# Allegro board PSU-A1-2.brd
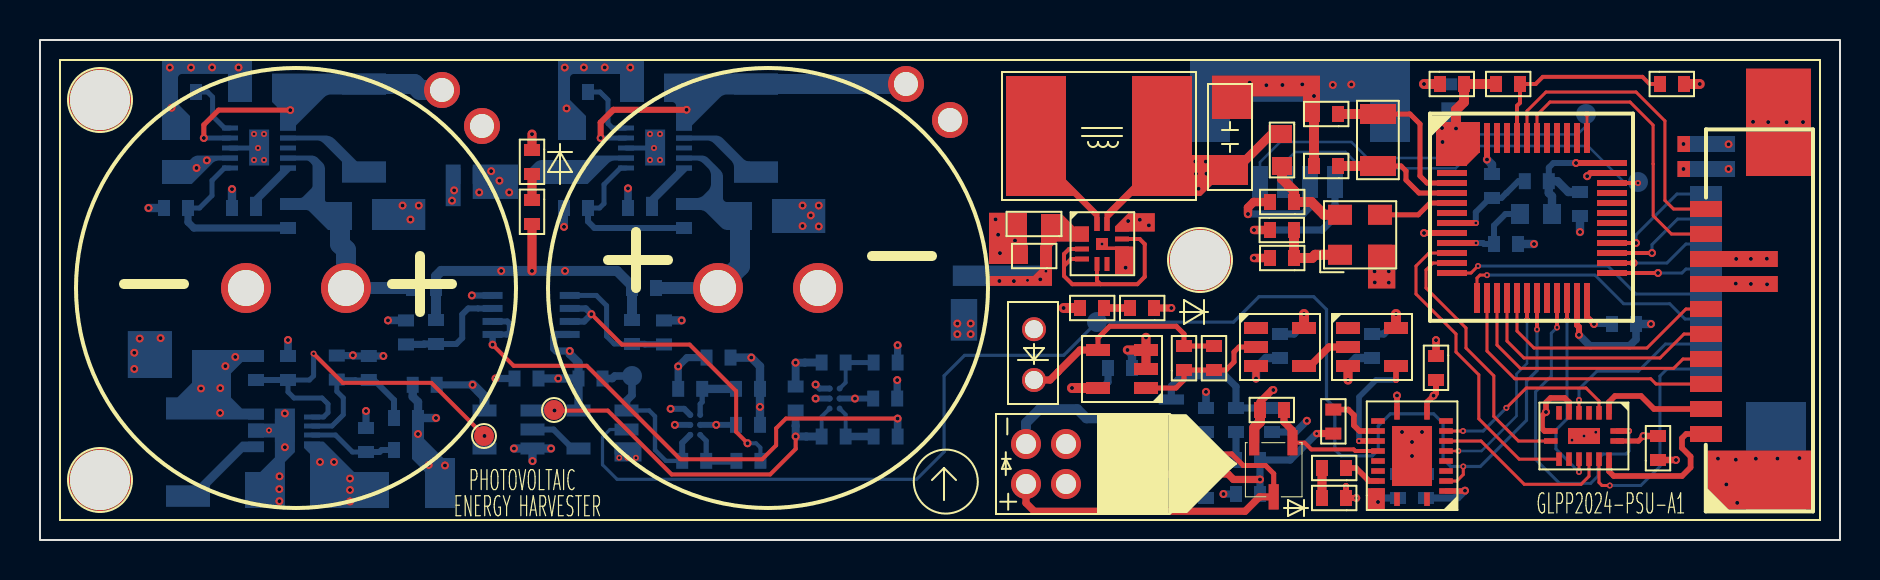
[diagram p0: board, top side]
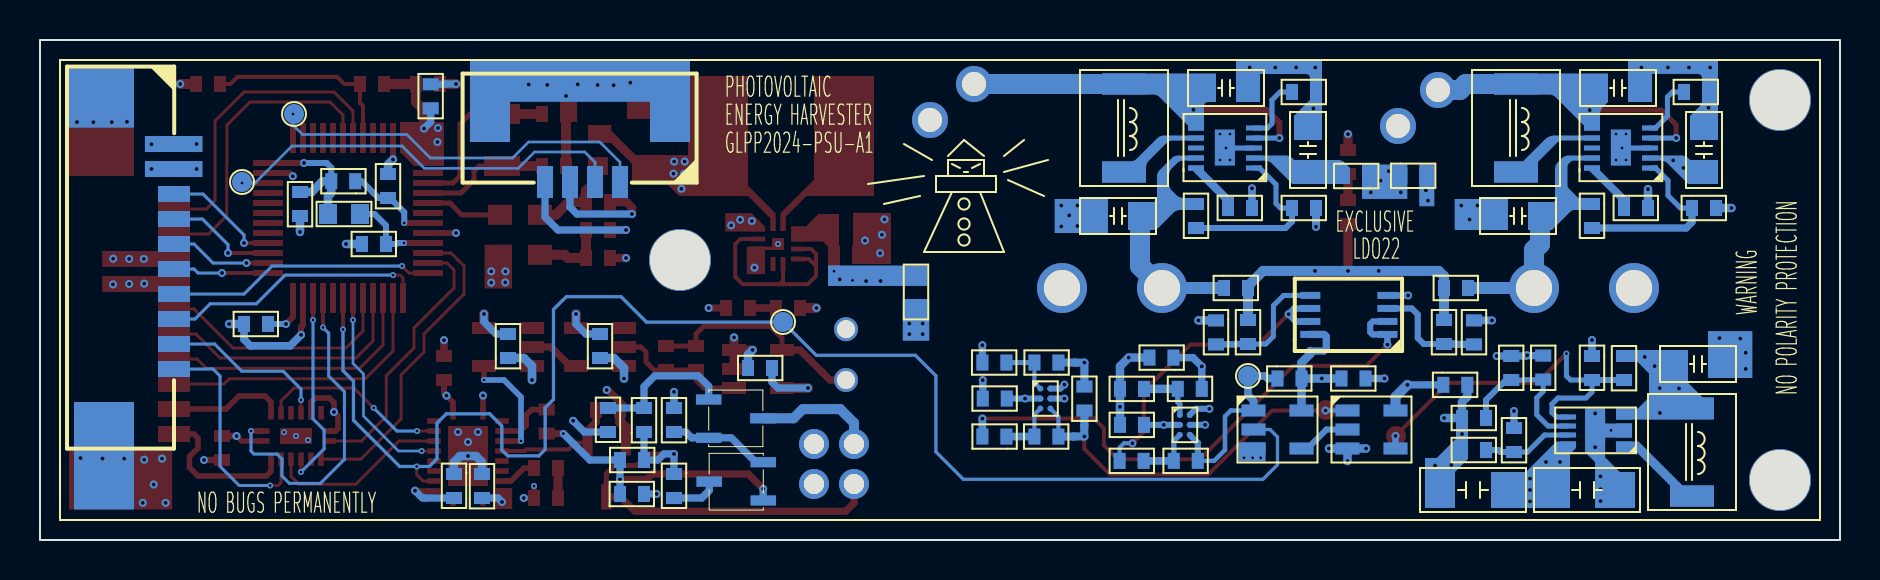
[diagram p1: board, bottom side, seen from below]

Outline 90 x 25 mm; copper layers: TOP, GND, VCC, BOTTOM. Coordinates in mm from the lower left corner of the outline.
Outline path: rectangle 0,0 90,25

## Design rules (mm)
constraint set DEFAULT: min track width 0.127
net group N478267: nets N478267 N478271
net group N485107: nets N485107 N485115
net group TX_PWR_EN: nets N478365 TX_PWR_EN
net group VCAP1: nets N478345 VCAP1
net group VCAP2: nets N485373 VCAP2
net group BOOST_EN: nets BOOST_EN N478287 N479043 N490401 N490405 VCAP
net group CHG_FULL: nets CHG_FULL N490413 N490465 N490853 N490915 N491089 N491653 UV_SHDN
net group FIBER_TX_3V3: nets FIBER_TX_3V3 N527048 N527198 N527202 N527222
net group P1V8: nets N517140 N518111 N602776

## Placement (name value [footprint] x y rotation side)
C1  0.1uF  [C0402]  70 22.8 0 top
C2  12pF  [C0402]  64.9 21.3 180 top
C3  33uF  [C1206]  59.5 21.8 270 top
C4  12pF  [C0402]  64.9 18.7 180 top
C5  0.1uF  [C0402]  62.7 16.9 180 top
C6  10uF  [C0603]  50.5 15.8 180 top
C7  0.1uF  [C0402]  50.3 14.2 180 top
C8  4.2V/1F  [SUC_THR_5D0_21D5]  12.8 12.6 180 top
C9  4.2V/1F  [SUC_THR_5D0_21D5]  36.4 12.6 0 top
C10  DNI  [C0402]  58.7 8.5 90 top
C11  0.1uF  [C0402]  69.8 9.2 270 top
C12  0.1uF  [C0402]  80.9 4 90 top
C13  0.1uF  [C0402]  70.47 22.78 270 bottom
C14  10uF  [C0805]  31.8 22.6 180 bottom
C15  10uF  [C0805]  12.2 22.6 180 bottom
C16  10uF  [C0805]  26.6 18.4 90 bottom
C17  10uF  [C0805]  6.8 18.4 90 bottom
C18  0.1uF  [C0402]  72.6 17.1 90 bottom
C19  0.1uF  [C0402]  77 16.2 90 bottom
C20  1uF  [C0402]  30.6 16.6 180 bottom
C21  1uF  [C0402]  10.8 16.6 180 bottom
C22  10uF  [C0805]  35 16.2 0 bottom
C23  10uF  [C0805]  15 16.2 0 bottom
C24  0.1uF  [C0402]  73.9 14.8 180 bottom
C25  0.1uF  [C0402]  79.8 10.8 180 bottom
C26  0.1uF  [C0402]  66.6 9.1 90 bottom
C27  0.1uF  [C0402]  62 9.1 90 bottom
C28  0.1uF  [C0402]  33.33 9.12 0 bottom
C29  2.2uF  [C0402]  42.88 8.87 180 bottom
C30  10uF  [C0805]  8.2 8.8 180 bottom
C31  33pF  [C0402]  16.44 9.2 270 bottom
C32  0.1uF  [C0402]  53.4 8.6 0 bottom
C33  0.1uF  [C0402]  24.93 8.07 180 bottom
C34  0.1uF  [C0402]  19.84 7.76 180 bottom
C35  2.2uF  [C0402]  36 7.56 180 bottom
C36  0.1uF  [C0402]  42.86 7.07 180 bottom
C37  0.1uF  [C0402]  36 5.76 180 bottom
C38  0.1uF  [C0402]  69.3 3.3 270 bottom
C39  0.1uF  [C0402]  67.9 2.1 90 bottom
C40  22uF  [C1206]  16.7 2.5 0 bottom
C41  22uF  [C1206]  14.3 2.5 180 bottom
D1  GREEN LED  [LED0402]  24.6 19.5 270 top
D2  GREEN LED  [LED0402]  55.7 11.6 180 top
D3  GREEN LED  [LED0402]  65.3 2.1 180 top
J1  SIP-1x10  [SMD-1D25-10P-DEG0]  83.3 5.3 90 top
J2  SIP-1x4  [SMD-1D25-4P-DEG0]  61 17.9 0 bottom
J3  SIP-1x10  [SMD-1D25-10P-DEG0]  83.3 19.8 270 bottom
L1  33uH/1A  [IND_SMD_7D0X6D6]  56.1 20.2 180 top
L2  2.2uH  [L0603]  62.1 20.3 270 top
L3  10uH/1A  [IND_SMD_4D4X4D2]  35.8 22.8 270 bottom
L4  10uH/1A  [IND_SMD_4D4X4D2]  16.2 22.8 270 bottom
L5  2.2uH  [L0603]  75.6 16.3 180 bottom
L6  2.2uH/500mA  [L0603]  46.2 11.6 90 bottom
L7  4.7uH/1A  [IND_SMD_4D4X4D2]  7.4 6.6 270 bottom
LD1  LaserDiode  [AXIAL_2D0_4P]  49.3 2.8 90 top
NOREF  -  []  0 25 0 top
NOREF#2  -  [unnamed#2]  3 3 0 top
NOREF#3  -  []  3 3 90 top
NOREF#4  -  []  0 0 90 top
NOREF#5  -  [unnamed#2]  58 14 0 top
NOREF#6  -  [unnamed#2]  3 22 0 top
PD1  Photodiode  [PD-THR-2P]  49.7 8 90 top
Q1  Si2301BDS-HXY  [SOT23-3]  63.1 5.3 180 top
Q2  2SC1815  [SOT23-3]  57 7.5 270 bottom
Q3  2SC1815  [SOT23-3]  53.4 1.5 90 bottom
R1  DNI  [R0402]  24.6 17 270 top
R2  DNP  [R0402]  61.5 15.5 0 top
R3  0R  [R0402]  62.7 14.1 180 top
R4  2K  [R0402]  53.2 11.6 180 top
R5  DNI  [R0402]  57.2 8.5 90 top
R6  10K  [R0402]  61 6.5 0 top
R7  510  [R0402]  64.67 6.52 270 top
R8  2K  [R0402]  65.3 3.6 180 top
R9  200K  [R0402]  27.4 22.4 180 bottom
R10  200K  [R0402]  7.8 22.4 180 bottom
R11  10K  [R0402]  74.24 17.94 0 bottom
R12  1M  [R0402]  27.4 16.6 180 bottom
R13  1M  [R0402]  7.4 16.6 180 bottom
R14  2.26M  [R0402]  32.2 16.8 270 bottom
R15  2.26M  [R0402]  12.4 16.8 270 bottom
R16  0R  [R0402]  30.8 12.6 180 bottom
R17  0R  [R0402]  19.8 12.6 180 bottom
R18  1M  [R0402]  31.2 10.98 270 bottom
R19  1M  [R0402]  29.6 9.8 90 bottom
R20  1M  [R0402]  19.8 9.8 90 bottom
R21  1M  [R0402]  18.3 10.98 270 bottom
R22  3.3K  [R0402]  39.08 8.87 0 bottom
R23  1M  [R0402]  14.84 8.02 90 bottom
R24  100K  [R0402]  12.4 9.2 270 bottom
R25  DNI  [R0402]  10.8 8 90 bottom
R26  22.9K?  [R0402]  28.12 8.07 180 bottom
R27  3.3K  [R0402]  31.91 7.56 0 bottom
R28  378K?  [R0402]  37.78 6.47 90 bottom
R29  562K  [R0402]  18.9 6.1 180 bottom
R30  510  [R0402]  61.6 6.6 270 bottom
R31  510  [R0402]  59.8 5.4 90 bottom
R32  40.2  [R0402]  58.3 5.4 90 bottom
R33  200K  [R0402]  41.68 5.17 0 bottom
R34  998K?  [R0402]  40.28 5.17 180 bottom
R35  DNI  [R0402]  16.3 4.4 90 bottom
R36  100K  [R0402]  18.9 4.5 180 bottom
R37  510  [R0402]  59.8 4 0 bottom
R38  3.01K  [R0402]  34.82 3.96 0 bottom
R39  4.99K  [R0402]  33.31 3.96 180 bottom
R40  40.2  [R0402]  58.3 3.3 270 bottom
R41  510  [R0402]  61 2.3 180 bottom
R42  DNP  [R0402]  21.93 18.21 180 bottom
R43  0R  [R0402]  23.6 18.2 0 bottom
R44  0R  [R0402]  81 22.8 0 top
R45  DNI  [R0402]  74 22.8 180 top
TP1  Solar Cell V+  [TP_THR_1D8_1D2]  43.3 22.8 180 bottom
TP2  Solar Cell V+  [TP_THR_1D8_1D2]  20.1 22.5 180 bottom
TP3  Solar Cell V-  [TP_THR_1D8_1D2]  45.5 21 180 bottom
TP4  Solar Cell V-  [TP_THR_1D8_1D2]  22.1 20.7 180 bottom
TP5  T POINT S  [TP_SMD_1D0_NP]  77.3 21.3 180 bottom
TP6  T POINT S  [TP_SMD_1D0_NP]  79.9 17.9 180 bottom
TP7  T POINT S  [TP_SMD_1D0_NP]  52.85 10.9 180 bottom
TP8  T POINT S  [TP_SMD_1D0_NP]  29.6 8.2 180 bottom
TP9  T POINT S  [TP_SMD_1D0_NP]  22.2 5.2 0 top
TP10  T POINT S  [TP_SMD_1D0_NP]  25.7 6.5 0 top
U1  STM32L051C8T6  [LQFP-48]  74.6 16.1 270 top
U2  LTC3336EV#TRPBF  [LQFN-12-2D0X2D0MM]  53.1 14.8 0 top
U3  SN74AHC1G14DBVR  [SOT-23-5]  60.8 10.6 0 top
U4  SN74AHC1G14DBVR  [SOT-23-5]  65.4 10.6 0 top
U5  TLV365DBVR  [SOT-23-5]  55.3 7.6 180 top
U6  TMUX1309BQBR  [WQFN-16-3D5X2D5MM]  77.2 5.2 180 top
U7  TXS0108ERGYR  [VQFN-20]  68.6 4.2 90 top
U8  LTC3105EDD#PBF  [DFN-10]  32.2 18.6 90 bottom
U9  LTC3105EDD#PBF  [DFN-10]  12.4 18.6 90 bottom
U10  ADA4051-2ARMZ  [MSOP-8]  26.24 10.28 90 bottom
U11  ADCMP380-1ACBZ-RL7  [WLCSP-6]  39.98 7.57 180 bottom
U12  ADCMP380-1ACBZ-RL7  [WLCSP-6]  33.01 6.26 180 bottom
U13  SN74LVC1G32DBVR  [SOT-23-5]  29.32 6.48 180 bottom
U14  SN74AUP1G08DBVR  [SOT-23-5]  24.62 6.48 180 bottom
U15  LTC3539EDCB#PBF  [DFN-8]  13.6 4.8 90 bottom
Y1  32.768KHz  [SMD3215-2P]  66.9 21.3 270 top
Y2  32.0MHz_X1G0041710040  [SMD2520-4P]  66 15.3 0 top

## Library data of the parts
C1-C7 C10-C13 C19 C25-C27 C32-C34 C38 C39 = CAP NP
C8 C9 C14-C18 C22-C24 C30 = CAP NP: signal model: DEFAULT_CAPACITOR_1e+07pF_2_1
C20 C21 = CAP NP: signal model: DEFAULT_CAPACITOR_1e+06pF_2_1
C28 C36 C37 = CAP NP: signal model: DEFAULT_CAPACITOR_100000pF_2_1
C29 C35 = CAP NP: signal model: DEFAULT_CAPACITOR_2.2e+06pF_2_1
C31 = CAP NP: signal model: DEFAULT_CAPACITOR_33.000000pF_2_1
C40 C41 = CAP NP: signal model: DEFAULT_CAPACITOR_2.2e+07pF_2_1
D1-D3 = LED
J1 J3 = SIP-1x10
J2 = SIP-1x4
L1 L2 L6 = INDUCTOR
L3 L4 = INDUCTOR: signal model: DEFAULT_INDUCTOR_10000nH_2_1
L5 L7 = INDUCTOR: signal model: DEFAULT_INDUCTOR_4700nH_2_1
LD1 = LaserDiode
PD1 = Photodiode
Q1 = FH3415A
Q2 Q3 = 2SC1815
R1-R5 R8 R16 R17 R42 R43 = R
R6 R24-R26 R28 R35 R36 = R: signal model: DEFAULT_RESISTOR_10000OHM_2_1
R7 R30 R31 R37 R41 = R: signal model: DEFAULT_RESISTOR_510.000000OHM_2_1
R9 R10 = R: signal model: DEFAULT_RESISTOR_200000OHM_2_1
R11-R13 R18-R21 R23 R44 R45 = R: signal model: DEFAULT_RESISTOR_0.001OHM_2_1
R14 R15 = R: signal model: DEFAULT_RESISTOR_0.00226OHM_2_1
R22 R27 = R: signal model: DEFAULT_RESISTOR_3300OHM_2_1
R29 = R: signal model: DEFAULT_RESISTOR_562000OHM_2_1
R32 R40 = R: signal model: DEFAULT_RESISTOR_40.000000OHM_2_1
R33 R38 = R: signal model: DEFAULT_RESISTOR_36000OHM_2_1
R34 R39 = R: signal model: DEFAULT_RESISTOR_147000OHM_2_1
TP1-TP4 = T POINT A
TP5-TP10 = T POINT S
U1 = STM32L051C8T6
U2 = LTC3336
U3 U4 = SN74AHC1G14DBVR
U5 = TLV365DBVR
U6 = TMUX1309
U7 = TXS0108ERGYR
U8 U9 = LTC3105EDD#PBF
U10 = ADA4051-2ARMZ
U11 U12 = ADCMP380-1ACBZ-RL7
U13 = SN74LVC1G32DBVR
U14 = SN74AUP1G08
U15 = LTC3539EDCB#PBF
Y1 = CRYSTAL
Y2 = OSCILLATOR

## Footprints (pads in the part's own frame, mm; a bottom-side part is the same pattern mirrored in y, then rotated)
AXIAL_2D0_4P
  round 1.5 hole 1: 1(0,0) 2(2,0) 3(0,-2) 4(2,-2)
C0402
  rect 0.6x0.8 smd: 1(0,0) 2(1.2,0)
C0603
  rect 0.9x1 smd: 1(0,0) 2(1.6,0)
C0805
  rect 1.2x1.4 smd: 1(0,0) 2(2.2,0)
C1206
  rect 1.5x1.8 smd: 1(0,0) 2(3.3,0)
DFN-8
  rect 0.25x0.8 smd: 1(0,-2.8) 2(0.45,-2.8) 3(0.9,-2.8) 4(1.35,-2.8) 5(1.35,0) 6(0.9,0) 7(0.45,0) 8(0,0)
  rect 1.2x1 smd: 9(0.676,-1.355)
DFN-10
  rect 0.25x0.8 smd: 1(0,-2.9) 2(0.5,-2.9) 3(1,-2.9) 4(1.5,-2.9) 5(2,-2.9) 6(2,0) 7(1.5,0) 8(1,0) 9(0.5,0) 10(0,0)
  rect 1.8x1 smd: 11(1.022,-1.444)
IND_SMD_4D4X4D2
  rect 1.05x2.2 smd: 1(0,0) 2(4.4,0)
IND_SMD_7D0X6D6
  rect 3x6 smd: 1(0,0) 2(6.3,0)
L0603
  rect 0.9x1 smd: 1(0,0) 2(1.6,0)
LED0402
  rect 0.6x0.8 smd: 1(0,0) 2(1.2,0)
LQFN-12-2D0X2D0MM
  rect 0.7x0.25 smd: 1(-1,0.75) 2(-1,0.25) 3(-1,-0.25) 4(-1,-0.75) 7(1,-0.75) 8(1,-0.25) 9(1,0.25) 10(1,0.75)
  rect 0.25x0.7 smd: 5(-0.25,-1) 6(0.25,-1) 11(0.25,1) 12(-0.25,1)
  rect 0.6x0.6 smd: 13(0,0)
LQFP-48
  rect 0.3x1.5 smd: 1(-2.75,-4) 2(-2.25,-4) 3(-1.75,-4) 4(-1.25,-4) 5(-0.75,-4) 6(-0.25,-4) 7(0.25,-4) 8(0.75,-4) 9(1.25,-4) 10(1.75,-4) 11(2.25,-4) 12(2.75,-4) 25(2.75,4) 26(2.25,4) 27(1.75,4) 28(1.25,4) 29(0.75,4) 30(0.25,4) 31(-0.25,4) 32(-0.75,4) 33(-1.25,4) 34(-1.75,4) 35(-2.25,4) 36(-2.75,4)
  rect 1.5x0.3 smd: 13(4,-2.75) 14(4,-2.25) 15(4,-1.75) 16(4,-1.25) 17(4,-0.75) 18(4,-0.25) 19(4,0.25) 20(4,0.75) 21(4,1.25) 22(4,1.75) 23(4,2.25) 24(4,2.75) 37(-4,2.75) 38(-4,2.25) 39(-4,1.75) 40(-4,1.25) 41(-4,0.75) 42(-4,0.25) 43(-4,-0.25) 44(-4,-0.75) 45(-4,-1.25) 46(-4,-1.75) 47(-4,-2.25) 48(-4,-2.75)
MSOP-8
  rect 0.35x1 smd: 1(-0.001,-3.615) 2(0.649,-3.615) 3(1.299,-3.615) 4(1.949,-3.615) 5(1.949,0.241) 6(1.299,0.241) 7(0.649,0.241) 8(-0.001,0.241)
PD-THR-2P
  round 1.2 hole 0.9: 1(0,0) 2(2.54,0)
R0402
  rect 0.6x0.8 smd: 1(0,0) 2(1.2,0)
SMD2520-4P
  rect 1.2x1 smd: 1(-1,-1.04) 2(1,-1.04) 3(1,0.96) 4(-1,0.96)
SMD3215-2P
  rect 1x1.8 smd: 1(0,0) 2(2.6,0)
SMD-1D25-4P-DEG0
  rect 0.8x1.6 smd: 1(0,0) 2(1.25,0) 3(2.5,0) 4(3.75,0)
  rect 2x3 smd: 5(6.5,-3.5) 6(-2.5,-3.5)
SMD-1D25-10P-DEG0
  rect 0.8x1.6 smd: 1(0,0) 2(1.25,0) 3(2.5,0) 4(3.75,0) 5(5,0) 6(6.25,0) 7(7.5,0) 8(8.75,0) 9(10,0) 10(11.25,0)
  rect 2x3 smd: 11(-2.6,-3.5) 12(13.9,-3.5)
SOT23-3
  rect 0.51x1.27 smd: 1(0.476,0.434) 2(2.391,0.434) 3(1.415,3.142)
SOT-23-5
  rect 1.2x0.6 smd: 1(0,0) 2(0,-0.95) 3(0,-1.9) 4(2.4,-1.9) 5(2.4,0)
SUC_THR_5D0_21D5
  round 2.5 hole 1.8: 1(-2.5,0) 2(2.5,0)
TP_SMD_1D0_NP
  round 1 smd: 1(0,0)
TP_THR_1D8_1D2
  round 1.8 hole 1.2: 1(0,0)
unnamed#2
  round 3.1 hole 3 unplated: (0,0)
VQFN-20
  rect 0.68x0.28 smd: 1(-2.157,-0.75) 10(2.158,-0.75) 11(2.158,0.75) 20(-2.157,0.75)
  rect 0.28x0.68 smd: 2(-1.75,-1.7) 3(-1.25,-1.7) 4(-0.75,-1.7) 5(-0.25,-1.7) 6(0.25,-1.7) 7(0.75,-1.7) 8(1.25,-1.7) 9(1.75,-1.7) 12(1.75,1.7) 13(1.25,1.7) 14(0.75,1.7) 15(0.25,1.7) 16(-0.25,1.7) 17(-0.75,1.7) 18(-1.25,1.7) 19(-1.75,1.7)
  rect 3x2 smd: EPAD(0,0)
WLCSP-6
  round 0.3 smd: A1(0,0) A2(0.5,0) B1(0,-0.5) B2(0.5,-0.5) C1(0,-1) C2(0.5,-1)
WQFN-16-3D5X2D5MM
  rect 0.68x0.28 smd: 1(-1.658,-0.25) 8(1.657,-0.25) 9(1.657,0.25) 16(-1.658,0.25)
  rect 0.28x0.68 smd: 2(-1.25,-1.158) 3(-0.75,-1.158) 4(-0.25,-1.158) 5(0.25,-1.158) 6(0.75,-1.158) 7(1.25,-1.158) 10(1.25,1.157) 11(0.75,1.157) 12(0.25,1.157) 13(-0.25,1.157) 14(-0.75,1.157) 15(-1.25,1.157)
  rect 1.6x0.8 smd: EPAD(0,0)

## Nets
GND: C1.1 C2.2 C3.1 C4.2 C5.2 C6.2 C7.2 C8.2 C9.2 C11.1 C12.1 C13.1 C14.2 C15.2 C16.2 C17.2 C18.2 C19.1 C20.2 C21.2 C22.2 C23.2 C24.1 C25.1 C26.1 C27.1 C28.2 C29.1 C30.2 C32.2 C33.2 C34.2 C35.1 C36.1 C37.1 C38.1 C39.2 C40.2 C41.2 D1.1(CATHODE) D2.1(CATHODE) D3.1(CATHODE) J1.8 J1.11 J1.12 J2.3 J2.5 J2.6 J3.2 J3.11 J3.12 PD1.2 R3.2 R9.2 R10.2 R12.2 R13.2 R18.1 R21.1 R24.1 R29.1 R30.2 R32.2 R36.1 R41.2 R44.2 TP3.1(TP) TP4.1(TP) U1.8(VSSA) U1.23 U1.35 U1.47 U2.7 U2.8 U2.10 U2.13 U3.3 U4.3 U5.2 U5.3 U6.6 U6.8 U6.EPAD U7.11 U7.EPAD U8.3 U8.11 U9.3 U9.11 U10.4(V-) U11.A2 U11.B2 U12.A2 U12.B2 U13.3 U14.3 U15.2 U15.3 U15.9 Y2.2
P1V8: C1.2 C3.2 C11.2 C12.2 C13.2 C19.2 C25.2 C38.2 J2.4 L1.1 L2.1 L5.1 R2.1 R11.2 R45.2 U1.1 U1.24 U1.36 U1.48 U2.11(VOUT) U6.16(VDD) U7.2 U7.10
P3V3: C26.2 C27.2 C31.1 C32.1 C39.1 C40.1 C41.1 J1.7 J3.1 L6.1 Q1.2(S) R4.2 R6.1 R23.2 U3.5 U4.5 U5.5 U7.19(VCCB) U15.8(VOUT)
BOOST_EN: R24.2 R25.1 TP9.1(TP) U14.4(Y) U15.5
CHG_FULL: R26.1 R39.2 TP8.1(TP) U12.C2 U13.1
FIBER_RX: U6.13 U7.7
FIBER_RX_3V3: U4.4(Y) U7.14
FIBER_TX: U6.3 U7.8
FIBER_TX_3V3: R7.1 U7.13
I2C1_SCL: J1.9 U1.42
I2C1_SDA: J1.10 U1.43
IAM_ALIVE: TP7.1(TP) U1.19 U7.3 U13.2
IR_UART_RX: J3.10 U6.14
IR_UART_TX: J3.9 U6.5
LDO22: C28.1 C33.1 C34.1 C36.2 C37.2 R22.1 R26.2 R27.1 R28.2 R42.1 R43.1 U10.8 U11.B1 U12.B1 U13.5 U14.5
LDO22-1: C17.1 R42.2 U9.2
LDO22-2: C16.1 R43.2 U8.2
LPUART1_RX: U1.22 U6.12
LPUART1_TX: U1.21 U6.1
OV_UART_RX: J1.1 U6.15
OV_UART_TX: J1.2 U6.2
ROUTE_A0: U1.10 U6.10
ROUTE_A1: U1.11 U6.9
SPI1_MISO: J1.5 U1.16
SPI1_MOSI: J1.6 U1.17
SPI1_NSS: J1.3 U1.14
SPI1_SCK: J1.4 U1.15
SPI2_MISO: J3.4 U1.27
SPI2_MOSI: J3.3 U1.28
SPI2_NSS: J3.6 U1.25
SPI2_SCK: J3.5 U1.26
SYS_SWCLK: J2.1 TP5.1(TP) U1.37
SYS_SWDIO: J2.2 TP6.1(TP) U1.34
TX_EN: U1.18 U7.6
TX_PWR_EN: Q1.1 R6.2 U7.15
USART1_RX: U1.31
USART1_TX: U1.30
USART2_RX: J3.8 U1.13
USART2_TX: J3.7 U1.12
UV_SHDN: R28.1 R34.2 TP10.1(TP) U11.C2 U14.1
VCAP: C30.1 L7.1 R1.2 R16.2 R17.1 R19.2 R20.2 R25.2 R35.2 U15.4
VCAP1: C8.1 C23.1 R15.1 R17.2 U9.9(VOUT)
VCAP2: C9.1 C22.1 R14.1 R16.1 U8.9(VOUT)
N478267: C15.1 L4.1 TP2.1(TP) U9.4 U9.6
N478271: L4.2 U9.7
N478287: L7.2 U15.1
N478345: R13.1 R15.2 U9.1
N478365: C31.2 R23.1 R29.2 U15.6
N478369: R10.1 U9.5
N478385: C21.1 U9.10
N479043: R35.1 R36.2 U15.7
N485107: C14.1 L3.1 TP1.1(TP) U8.4 U8.6
N485115: L3.2 U8.7
N485373: R12.1 R14.2 U8.1
N485445: R9.1 U8.5
N485483: C20.1 U8.10
N490401: R18.2 R19.1 U10.5
N490405: R20.1 R21.2 U10.3
N490413: C29.2 R22.2 U11.A1(VCC)
N490465: R33.2 U10.1 U10.2
N490853: R33.1 R34.1 U11.C1
N490915: R38.2 U10.6 U10.7
N490953: U13.4(Y) U14.2
N491089: C35.2 R27.2 U12.A1(VCC)
N491611: C6.1 C7.1 L6.2 U2.1 U2.2
N491653: R38.1 R39.1 U12.C1
N492211: L1.2 U2.12
N492453: U2.3 U2.4 U2.5 U2.9
N504730: C2.1 U1.3 Y1.1
N504882: C4.1 U1.4 Y1.2
N512213: U1.5 Y2.3
N512221: R2.2 R3.1 Y2.1
N512229: C5.1 L2.2 Y2.4(VDD)
N517140: C24.2 L5.2 U1.9
N518111: C18.1 R11.1 U1.7
N527048: LD1.1 Q1.3 R31.1 R37.1 R40.1
N527184: LD1.2 Q2.3
N527198: Q3.1 R7.2 R37.2 R41.1
N527202: Q3.3 R40.2
N527222: Q2.1 R30.1 R31.2
N527434: Q2.2(E) Q3.2(E) R32.1
N541574: D3.2 R8.2
N546758: C10.2 PD1.1 R5.2 U5.4
N546765: C10.1 R5.1 U3.2 U5.1(VOUT)
N549679: U3.4(Y) U4.2
N554827: D2.2 R4.1
N555295: D1.2 R1.1
N563900: R8.1 U7.18
N602776: R44.1 R45.1 U1.44

Pads without a net: LD1 3 4; U1 2 6 20 29 32 33 38 39 40 41 45 46; U2 6; U3 1; U4 1; U6 4 7 11; U7 1 4 5 9 12 16 17 20; U8 8; U9 8

## Via types
v1: diameter 0.4, hole 0.2, TOP to BOTTOM, 197 vias
v2: diameter 0.3, hole 0.15, TOP to BOTTOM, 43 vias

## Routing (per net, layer and track width the routed paths; a pad name or vN(x,y) marks a point on that pad's centre or on a via; arc(x,y) is an arc through that point)
GND: length 76
  TOP w0.28: U7.11 v1(67.85,7.22) ; U6.8 75.23,5.45 75.1,5.58 75.1,6.2 v1(75.3,6.4) 75.3,6.87 75.53,7.1 76.24,7.1 76.45,6.89 U6.6
  TOP w0.3: U1.23 76.85,10.75 76.95,10.65 76.95,10.26 v1(76.95,10.26) ; v1(77.36,18.19) 77.52,18.35 U1.35 ; U1.47 v1(72.35,19.02) ; v1(65.81,2.1) D3.1 v2(65.3,2.7) ; U1.8 v1(69.2,15.35)
  TOP w0.32: C12.1 v1(81.8,4)
  TOP w0.36: D2.1 v1(56.57,11.6) ; U3.3 v1(60.8,8.07)
  TOP w0.38: C11.1 v1(69.8,9.99)
  TOP w0.42: v1(60.4,16.3) 60.4,16.62 60.68,16.9 C5.2 ; R3.2 v1(60.7,14.1)
  TOP w0.46: v1(55.3,10.13) U5.3 ; U5.3 v1(54.37,9.5) ; U5.3 U5.2 ; U4.3 v1(65.4,8) ; D1.1 v1(24.6,20.29)
  TOP w0.5: C4.2 C2.2 v1(63.7,22.2) ; R44.2 v1(82.99,22.8) ; C1.1 v1(69.2,22.8)
  BOTTOM w0.25: U9.3 v2(10.9,19.6) ; U8.3 v2(30.7,19.6)
  BOTTOM w0.3: U12.A2 32.21,6.56 v1(31.53,6.56) ; v1(38.78,7.77) 38.98,7.57 U11.A2 ; U11.B2 v1(38.78,7.07) ; U12.B2 v1(31.75,5.76)
  BOTTOM w0.32: U10.4 v1(21.59,12.23)
  BOTTOM w0.36: v1(69.2,22.8) 69.74,22.8 69.76,22.78 C13.1 ; v1(63.34,5.96) 62.78,5.4 R30.2 ; J2.3 63.5,16.65 63.15,16.3 v1(60.4,16.3) ; R41.2 v1(59.17,2.3) ; C29.1 v1(42.88,9.74) ; C33.2 v1(22.78,8.07) ; C36.1 v1(42.86,8)
  BOTTOM w0.38: C25.1 79.8,10.03 79.48,9.71 77.49,9.71 v1(76.95,10.26) ; R21.1 v1(17.4,10.98) ; R24.1 v1(12.4,10) ; C20.2 v1(29.4,17.58) ; R32.2 v1(58.3,7.41)
  BOTTOM w0.4: R12.2 v1(26.2,15.66)
  BOTTOM w0.42: v1(23.7,4.57) U14.3 ; U14.3 v1(24.62,3.95) ; U14.3 v1(25.55,4.57) ; C27.1 61.3,9.1 60.8,8.6 v1(60.8,8.07) ; v1(65.4,8) U4.3 65.8,9.1 C26.1 ; C24.1 v1(74.7,14.8) ; v1(72.35,19.02) 72.6,18.77 C18.2 ; R18.1 v1(32.08,10.98) ; C37.1 v1(36,6.66) C35.1 36,8.68 v1(35.56,9.12) C28.2 ; C19.1 v1(77,15.4) ; v1(54.37,9.5) 54.6,9.27 C32.2 ; C39.2 67.9,3.89 68.21,4.2 v1(68.6,4.2) 68.99,4.2 69.3,3.89 C38.1 ; C34.2 18.64,7.17 18.9,6.9 R29.1 v1(19.8,6.1) ; v1(9.6,17.54) C21.2 ; R13.2 v1(5.43,16.6) ; C25.1 v1(80.55,10.8)
  vias: v1(4.71,9.36) v1(4.71,8.55) v1(4.99,10.07) v1(6.03,10.1) v1(6.49,23.62) v1(6.58,21.61) v1(7.55,23.62) v1(8.6,23.63) v1(9.93,23.63) v1(11.98,3.18) v1(11.97,2.54) v1(11.97,1.94) v1(12.24,6.33) v1(12.24,4.64) v1(18.13,16.72) v1(18.52,16.02) v1(18.94,16.72) v1(18.9,5.3) v1(19.43,3.75) v1(20.25,3.73) v1(26.24,23.62) v1(26.33,21.58) v1(27.2,23.63) v1(28.24,23.63) v1(29.51,23.62) v1(38.13,16.72) v1(38.13,15.7) v1(38.54,16.23) v1(38.94,16.72) v1(38.94,15.68) v1(47.78,16.03) v1(47.91,15.26) v1(48,14.34) v1(48.75,14.97) v1(54.28,13.62) v1(54.41,15.95) v1(54.99,16.01) v1(55.44,15.73) v1(60.49,22.87) v1(61.32,22.74) v1(62.12,22.75) v1(63.11,22.78) v1(64.64,22.75) v1(65.56,22.78) v1(66.73,13.43) v1(66.74,12.88) v1(67.44,13.43) v1(67.44,12.87) v1(68.1,5.4) v1(68.6,4.9) v1(69.1,5.4) v1(82.17,18.55) v1(83.72,1.86) v1(83.9,4.07) v1(84.31,2.78) v1(84.43,18.55) v1(84.81,14.05) v1(84.79,4.02) v1(84.86,1.86) v1(85.54,14.05) v1(85.65,20.91) v1(85.79,4.07) v1(86.34,14.06) v1(86.41,20.89) v1(86.87,4.07) v1(87.33,20.89) v1(87.97,4.1) v1(88.15,20.89) v2(10.7,20.3) v2(10.7,19) v2(11.2,20.3) v2(11.2,19) v2(11.45,5.48) v2(28.96,4.11) v2(29.37,4.11) v2(29.8,4.11) v2(30.5,20.3) v2(30.5,19) v2(31,20.3) v2(31,19) v2(53.1,14.8) v2(76.6,4.99) v2(77.2,5.2) v2(77.79,5.39)
P1V8: length 91.3
  TOP w0.26: v1(80.17,5.2) 79.92,4.95 U6.16
  TOP w0.28: U7.2 71.23,2.45 v1(71.25,2.47) ; v1(69.68,7.22) 69.35,6.89 U7.10
  TOP w0.3: v1(77.7,10.8) 77.35,11.15 U1.24 ; C11.2 69.8,7.34 v1(69.68,7.22) ; v1(76.8,18.85) U1.36
  TOP w0.32: C12.2 v1(80.17,5.2)
  TOP w0.42: R2.1 v1(60.7,15.5)
  TOP w0.5: R45.2 C1.2 71.2,21.9 70.8,21.5 v1(70.8,20.57)
  VCC w0.127: v1(77.7,10.8) 77.7,12.49 ; 77.7,12.49 78.8,11.39 78.8,10.22 ; 77.7,12.49 77.7,16.35 76.14,17.91 75.23,17.91 75.06,18.07 ; 71.41,7.9 70.73,7.22 v1(69.68,7.22) ; 71.41,7.9 72.33,8.82 77.64,8.82 78.8,9.97 78.8,10.22 ; 71.41,7.9 71.95,7.36 71.95,3.16 v1(71.25,2.47) ; v1(60.7,15.5) 61.15,15.5 61.89,16.24 61.89,17.13 60.81,18.21 58.77,18.21 58.4,17.84 58.2,17.84 v1(57.93,17.56) ; v1(70.1,20.6) 63.09,20.6 60.95,18.46 58.75,18.46 v1(58.29,18.92) ; 75.06,18.07 75.83,18.85 v1(76.8,18.85) ; 75.06,18.07 71.99,18.07 70.8,19.27 v1(70.8,20.57) ; 78.8,10.22 80.17,8.85 v1(80.17,5.2)
  VCC w0.3: 76.5,18.2 76.5,18.55 v1(76.8,18.85)
  BOTTOM w0.3: C25.2 77.74,10.8 v1(77.7,10.8) ; R11.2 75.44,18.62 75.67,18.85 v1(76.8,18.85)
  BOTTOM w0.36: C38.2 70.75,2.1 70.76,2.11 70.89,2.11 v1(71.25,2.47) ; C13.2 70.47,20.91 v1(70.8,20.57) ; J2.4 64.75,16.15 64.1,15.5 v1(60.7,15.5)
  BOTTOM w0.42: L5.1 75.6,17.19 75.44,17.35 R11.2 75.87,17.94 76.41,17.4 C19.2
  vias: v1(57.77,18.92) v1(57.8,18.31) v1(58.32,18.32) v1(70.13,19.9)
P3V3: length 16.4
  TOP w0.36: v1(61.67,7.5) 61.6,7.5 61,6.9 R6.1
  TOP w0.5: U3.5 v1(63.2,11.3) ; R4.2 v1(51.18,11.6) ; R6.1 61,5.9 60.71,5.61 Q1.2 ; U4.5 v1(67.8,11.3) ; v1(51.6,7.6) U5.5
  BOTTOM w0.36: v1(66.9,1.9) 67.1,2.1 C39.1 ; v1(63.2,11.3) 63.2,10.79 62.71,10.3 C27.2 ; v1(51.6,7.6) 53.11,7.6 53.4,7.89 C32.1 ; R23.2 15.63,9.22 v1(15.64,9.23) 15.68,9.2 C31.1 v1(17.17,9.2) ; C26.2 67.19,10.3 67.8,10.91 v1(67.8,11.3)
  vias: v1(14,3.9) v1(14.7,3.9) v1(15.5,3.07) v1(15.5,2.5) v1(15.5,1.93) v1(45.87,10.82) v1(45.87,10.29) v1(46.53,10.82) v1(46.53,10.29) v1(82.17,19.8) v1(84.43,19.79) v1(84.79,12.82) v1(85.54,12.8) v1(86.35,12.78)
BOOST_EN: length 19.1
  TOP w0.2: v1(22.23,5.2) 19.57,7.86 15.14,7.86 v2(13.68,9.32)
  BOTTOM w0.25: v2(13.68,9.32) 13.68,8.21 13.47,8 R24.2 12.4,7.4 12.7,7.1 14.1,7.1 14.4,6.8 14.4,6.37 14.18,6.15 U15.5
  BOTTOM w0.3: R25.1 R24.2 ; U14.4 v1(22.23,5.2)
CHG_FULL: length 9.6
  BOTTOM w0.22: R39.2 31.29,3.96 30.75,4.5 30.75,6.18 30.46,6.48 U13.1
  BOTTOM w0.3: U12.C2 32.11,4.86 R39.2
  BOTTOM w0.38: U13.1 29.32,6.97 29.6,7.24 TP8.1 28.74,8.2 28.62,8.07 R26.1
FIBER_RX: length 9.1
  TOP w0.15: U6.13 77.45,3.18 77.05,2.79 74.22,2.79 72.05,4.95 U7.7
FIBER_RX_3V3: length 6.1
  TOP w0.28: U7.14 v2(65.95,4.95) ; v2(67.8,8) U4.4
  BOTTOM w0.28: v2(67.8,8) 66.8,8 65.95,7.15 v2(65.95,4.95)
FIBER_TX: length 9.4
  TOP w0.15: U6.3 77.95,6.95 77.3,7.6 74.31,7.6 v2(73.32,6.61) ; U7.8 v2(71.15,5.45)
  BOTTOM w0.15: v2(73.32,6.61) 72.16,5.45 v2(71.15,5.45)
FIBER_TX_3V3: length 3
  TOP w0.28: U7.13 65.97,5.45 65.69,5.73 65.69,6.24 65.42,6.52 R7.1
I2C1_SCL: length 15.3
  TOP w0.15: U1.42 74.85,21.25 75.5,21.9 79.5,21.9 80.65,20.75 80.65,18.8 80.66,18.8 80.66,16.21 81.57,15.3 J1.9
I2C1_SDA: length 15.4
  TOP w0.15: J1.10 81.67,16.55 81.25,16.98 81.25,20.95 79.8,22.4 75.3,22.4 74.35,21.45 U1.43
IAM_ALIVE: length 74.8
  TOP w0.15: U7.3 70.84,2.95 71.16,3.27 v2(71.16,3.68)
  TOP w0.2: U1.19 v2(74.85,10.53)
  BOTTOM w0.127: 52.84,10.89 TP7.1
  BOTTOM w0.16: 29.32,5.52 28.5,5.52 28.12,5.15 28.12,3.76 28.86,3.03 43.83,3.03 45.21,4.41 45.21,8.21 46.23,9.23 51.18,9.23 52.18,10.23 52.18,10.23 TP7.1 ; v2(74.85,10.53) 74.85,8.47 74.33,7.94 74.33,5.99 72.02,3.68 v2(71.16,3.68) 70.54,3.68 70.15,4.06 70.15,5.84 69.68,6.31 67.52,6.31 66.91,5.7 66.91,4.5 66.61,4.21 65.06,4.21 64.74,4.52 64.74,6.61 64.33,7.03 64.33,11.52 63.68,12.17 60.95,12.17 59.67,10.89 52.84,10.89
IR_UART_RX: length 11.6
  TOP w0.15: U6.14 77.95,2.87 78.1,2.72 v2(78.49,2.72)
  BOTTOM w0.15: v2(78.49,2.72) 80.04,2.72 81,3.68 81,8.2 81.35,8.55 J3.10
IR_UART_TX: length 8.5
  TOP w0.15: U6.5 v2(76.95,7)
  BOTTOM w0.15: v2(76.95,7) 76.95,7.55 77.84,8.44 79.91,8.44 81.27,9.8 J3.9
LDO22: length 19.5
  BOTTOM w0.3: C36.2 v1(40.75,7.07) U11.B1 ; U12.B1 v1(33.81,5.76) C37.2
  BOTTOM w0.36: v1(26.48,9.45) 25.81,9.45 25.68,9.58 25.68,10.17 25.79,10.28 U10.8 ; v1(21.63,7.76) C34.1 ; R27.1 v1(31.91,8.68) 32.35,9.12 C28.1
  BOTTOM w0.4: R22.1 38.24,8.87 38.24,8.87 v1(37.78,8.87) R28.2
  BOTTOM w0.42: v1(26.48,9.45) 26.48,9.3 26.93,8.86 R26.2 ; R26.2 U13.5 ; R26.2 v1(25.91,8.07) C33.1
  BOTTOM w0.5: v1(21.63,7.76) 22.23,7.16 U14.5
  vias: v1(21.96,17.38) v1(22.56,18.44) v1(22.97,17.97) v1(23.46,17.38)
LDO22-1:
  vias: v1(7.83,18.6) v1(8.34,18.98) v1(20.6,16.97) v1(20.71,17.48)
LPUART1_RX: length 10.1
  TOP w0.15: U6.12 v2(76.95,3.4)
  TOP w0.2: U1.22 v2(76.35,11)
  BOTTOM w0.15: v2(76.95,3.4) 75.8,4.55 75.8,5.5 76.35,6.06 v2(76.35,11)
LPUART1_TX: length 16.4
  TOP w0.2: v2(75.85,10.63) U1.21
  TOP w0.28: U6.1 v2(79.45,5.45)
  BOTTOM w0.15: v2(79.45,5.45) 79.45,4.45 79.3,4.3 78.15,4.3 77.9,4.05 77.9,3.2 77.53,2.83 75.98,2.83 74.78,4.03 74.78,7.41 75.56,8.2 75.56,10.34 v2(75.85,10.63)
OV_UART_RX: length 7.9
  TOP w0.28: J1.1 82.31,5.3 82.1,5.09 82.1,4.6 82.53,4.17 82.53,3.63 82.1,3.2 78.69,3.2 78.45,3.44 U6.15
OV_UART_TX: length 5.8
  TOP w0.28: U6.2 78.45,6.9 78.75,7.2 80.05,7.2 80.7,6.55 J1.2
ROUTE_A0: length 15.9
  TOP w0.15: U6.10 73.96,4.04 71.94,6.06 71.94,8.26 70.8,9.4 70.8,10.3 68.8,12.3 68.8,13.7 69.45,14.35 U1.10
ROUTE_A1: length 13.5
  TOP w0.15: U1.11 69.65,13.85 69.3,13.5 69.3,12.6 71.3,10.6 71.3,9.6 72.69,8.21 72.69,6.18 73.92,4.95 U6.9
SPI1_MISO: length 12.9
  TOP w0.15: U1.16 73.35,9.95 74.2,9.1 81,9.1 82.2,10.3 J1.5
SPI1_MOSI: length 12.3
  TOP w0.15: J1.6 82.3,11.55 80.35,9.6 74.7,9.6 73.85,10.45 U1.17
SPI1_NSS: length 14.3
  TOP w0.15: J1.3 80.8,7.8 80.54,8.06 73.74,8.06 72.35,9.45 U1.14
SPI1_SCK: length 13.5
  TOP w0.15: J1.4 82.15,9.05 81.68,8.58 74.02,8.58 72.85,9.75 U1.15
SPI2_MISO: length 5.7
  TOP w0.2: v1(80.6,14.35) U1.27
  BOTTOM w0.15: v1(80.6,14.35) 80.6,14.77 81.88,16.05 J3.4
SPI2_MOSI: length 6
  TOP w0.2: U1.28 v1(79.8,14.85)
  BOTTOM w0.15: J3.3 81.85,17.3 79.8,15.25 v1(79.8,14.85)
SPI2_NSS: length 4.8
  TOP w0.2: U1.25 v1(80.9,13.35)
  BOTTOM w0.15: v1(80.9,13.35) 82.1,13.35 82.3,13.55 J3.6
SPI2_SCK: length 5.1
  TOP w0.2: U1.26 v1(79.68,13.85)
  BOTTOM w0.15: J3.5 82.3,14.8 81.35,13.85 v1(79.68,13.85)
SYS_SWCLK: length 20.5
  TOP w0.127: v2(77.35,21.3) U1.37
  BOTTOM w0.127: v2(77.35,21.3) 77.35,20.75 76.88,20.28 71.66,20.28 70.48,19.1 66.37,19.1 65.57,19.9 62.01,19.9 61,18.89 J2.1
SYS_SWDIO: length 21.7
  TOP w0.2: v2(79.9,17.85) U1.34
  BOTTOM w0.127: v2(79.9,17.85) 79.25,17.85 77.4,19.7 71.9,19.7 70.78,18.58 66.09,18.58 65.27,19.4 62.76,19.4 62.25,18.89 J2.2
TX_EN: length 10.4
  TOP w0.127: v2(70.92,4.45) U7.6
  TOP w0.2: U1.18 v2(74.35,11)
  BOTTOM w0.127: v2(74.35,11) 74.35,8.83 73.83,8.3 73.83,6.2 72.08,4.45 v2(70.92,4.45)
TX_PWR_EN: length 6.3
  TOP w0.2: Q1.1 63.23,4.87 63.57,4.53 65.69,4.53 65.77,4.45 U7.15
  TOP w0.36: R6.2 62.2,5.9 62.62,5.48 Q1.1
USART2_RX: length 13.4
  TOP w0.15: v2(72.35,13.24) 72,13.24 71.85,13.1 U1.13
  BOTTOM w0.15: J3.8 82.25,11.05 81.49,11.81 79.18,11.81 77.75,13.24 v2(72.35,13.24)
USART2_TX: length 13.4
  TOP w0.15: v2(71.9,13.7) 71.55,13.35 U1.12
  BOTTOM w0.15: J3.7 79.79,12.3 78.39,13.7 v2(71.9,13.7)
UV_SHDN: length 19.8
  TOP w0.2: v1(37.78,5.18) 37.78,4.55 36.51,3.28 31.58,3.28 28.39,6.47 26.12,6.47 26.12,6.48 v1(25.73,6.48)
  BOTTOM w0.2: v1(25.73,6.48) U14.1 ; U11.C2 39.08,6.17 R34.2
  BOTTOM w0.4: R34.2 38.32,5.17 38.31,5.18 v1(37.78,5.18) 37.78,5.7 37.78,5.71 R28.1
VCAP: length 17.3
  TOP w0.46: R1.2 v1(24.6,13.45)
  BOTTOM w0.36: v1(16.3,6.45) R35.2
  BOTTOM w0.5: R19.2 R16.2 29.6,12.7 28.85,13.45 v1(26.25,13.45) v1(24.6,13.45) v1(23.06,13.45) 20.06,13.45 19.8,13.19 R17.1 R20.2
  vias: v1(8.05,7.58) v1(9.01,7.59) v1(9.01,6.35) v1(9.27,8.69) v1(9.77,9.15)
VCAP1: length 7
  BOTTOM w0.6: R17.2 C8.1
  BOTTOM w1: C8.1 15.3,14.5 15,14.8 C23.1
VCAP2: length 7.2
  BOTTOM w0.6: C9.1 R16.1
  BOTTOM w1: C22.1 35,13.7 C9.1
N478267: length 10.6
  TOP w0.25: v1(8.19,20.1) 8.19,20.76 8.93,21.5 v1(12.51,21.5)
  BOTTOM w0.25: U9.4 v1(8.19,20.1)
  BOTTOM w1: TP2.1 19.01,22.5 18.71,22.8 L4.1
N478345: length 9.2
  BOTTOM w0.25: R13.1 7.98,16.6 8.6,17.22 8.6,17.98 9.22,18.6 U9.1
  BOTTOM w0.36: R13.1 7.4,15.89 7.69,15.6 R15.2
N478365: length 7.9
  BOTTOM w0.127: 14.84,8.02 R23.1
  BOTTOM w0.25: U15.6 14.6,5.7 15.16,6.26 15.16,7.11 14.84,7.43 14.84,8.02 15.77,8.02 15.79,8 C31.2
  BOTTOM w0.3: R29.2 17.7,7 16.7,8 C31.2
N478369: length 3
  BOTTOM w0.25: U9.5 9.22,20.6 8.63,21.2 8.63,22.15 8.38,22.4 R10.1
N479043: length 4.5
  BOTTOM w0.25: U15.7 14.77,5.25 15.62,4.4 R35.1
  BOTTOM w0.3: R36.2 17.08,4.5 16.98,4.4 R35.1
N485107: length 14.1
  TOP w0.3: v1(32.33,21.51) 28.67,21.51 28.03,20.87 v1(28.03,20.1)
  BOTTOM w0.25: U8.4 v1(28.03,20.1)
  BOTTOM w1: L3.1 TP1.1
N485373: length 8.9
  BOTTOM w0.25: U8.1 29.02,18.6 28.2,17.77 28.2,16.82 27.98,16.6 R12.1
  BOTTOM w0.3: R12.1 27.4,15.92 27.72,15.6 R14.2
N485445: length 3.3
  BOTTOM w0.25: R9.1 28,22.4 28.4,22 28.4,20.82 28.62,20.6 U8.5
N490401: length 6.6
  BOTTOM w0.25: U10.5 27.82,12.23 28.33,11.72 28.33,10.18 28.71,9.8 R19.1
  BOTTOM w0.32: R19.1 30.23,9.8 30.25,9.78 R18.2
N490405: length 5.8
  BOTTOM w0.3: R20.1 20.81,9.8 21.11,10.1 21.11,11.28 21.41,11.58 21.9,11.58 21.9,11.58 U10.3
  BOTTOM w0.36: R21.2 19.19,9.78 19.21,9.8 R20.1
N490413: length 2.8
  BOTTOM w0.2: 40.28,8.87 40.28,7.87 U11.A1
  BOTTOM w0.25: 40.28,8.87 C29.2
N490465: length 27.6
  TOP w0.2: v1(22.63,9.77) 23.68,8.71 27.34,8.71 32.01,4.04 36.11,4.04 36.81,4.74 36.81,5.58 37.29,6.07 v1(42.88,6.07)
  BOTTOM w0.3: U10.1 23.32,10.28 23.33,10.28 23.38,10.28 23.49,10.39 23.49,10.8 23.36,10.93 U10.2
  BOTTOM w0.32: U10.1 v1(22.63,9.77)
  BOTTOM w0.38: R33.2 v1(42.88,6.07)
N490853: length 2.9
  BOTTOM w0.2: U11.C1 40.28,6.27 R34.1
  BOTTOM w0.38: R34.1 R33.1
N490915: length 15.5
  TOP w0.2: v1(35.38,4.84) 34.81,5.41 34.81,7.45 32.48,9.77 29.09,9.77 v1(27.57,11.29)
  BOTTOM w0.2: v1(35.38,4.84) 35.8,4.84 36.02,4.62 R38.2
  BOTTOM w0.32: U10.6 27.28,11.58 v1(27.57,11.29) 27.2,10.93 U10.7
N490953: length 2.7
  BOTTOM w0.3: U13.4 26.62,4.57 25.68,5.52 24.62,5.52
N491089: length 3
  BOTTOM w0.26: R27.2 33.11,6.9 33.01,6.8 U12.A1
  BOTTOM w0.42: R27.2 C35.2
N491611:
  vias: v1(47.97,12.95) v1(48.69,12.95) v1(50.01,13.03) v2(49.38,12.98) v2(50.3,13.44)
N491653: length 2.9
  BOTTOM w0.26: R39.1 33.31,4.96 U12.C1
  BOTTOM w0.38: R39.1 R38.1
N492453: length 11.5
  TOP w0.2: 53.02,12.79 54.87,12.79 55.24,13.16 55.24,14.79 54.98,15.05 U2.9 ; 53.02,12.79 52.85,12.96 U2.5 ; 53.02,12.79 51.61,12.79 51.2,13.2 51.2,13.7 ; U2.4 51.55,14.05 51.2,13.7 ; 51.2,13.7 51.2,14.3 51.45,14.55 U2.3
N504730: length 8.7
  TOP w0.25: U1.3 69.35,17.85 69,18.2 69,20.8 68.5,21.3 Y1.1
  TOP w0.5: C2.1 Y1.1
N504882: length 6.5
  TOP w0.25: U1.4 68.95,17.35 68.3,18 68.3,18.45 68.05,18.7 Y1.2
  TOP w0.5: C4.1 Y1.2
N512213: length 3.8
  TOP w0.25: Y2.3 68.91,16.26 69.5,16.85 U1.5
N512221: length 3.8
  TOP w0.5: R2.2 R3.1 63.6,14.1 63.76,14.26 Y2.1
N512229: length 4.6
  TOP w0.5: L2.2 62.1,18.06 62.7,17.46 C5.1 63.57,16.9 64.21,16.26 Y2.4
N517140: length 4.6
  TOP w0.3: U1.9 v2(71.8,14.85)
  BOTTOM w0.3: L5.2 73.27,16.3 72.7,15.73 C24.2 72.2,14.8 72.15,14.85 v2(71.8,14.85)
N518111: length 4.8
  TOP w0.3: v2(71.79,15.85) U1.7
  BOTTOM w0.3: v2(71.79,15.85) 71.79,16.39 72.5,17.1 C18.1 73.07,17.1 73.32,17.35 73.33,17.35 73.92,17.94 R11.1
N527048: length 22.8
  TOP w0.25: v1(58.3,4.3) 59.58,4.3 60.16,3.73 61.28,3.73 61.69,3.32 Q1.3
  TOP w0.36: Q1.3 60.98,2.16 60.26,1.44 49.71,1.44 49.3,1.85 LD1.1
  BOTTOM w0.36: R40.1 v1(58.3,4.3) 58.81,4.3 59.11,4 R37.1 R31.1
N527184: length 6.1
  BOTTOM w0.5: LD1.2 49.3,5.86 49.99,6.54 51.86,6.54 52.32,6.09 Q2.3
N527198: length 14.1
  TOP w0.36: v1(61,3.03) 59.67,3.03 59.4,3.3 54.58,3.3 v1(53.84,2.56) ; v2(63.83,5.32) R7.2
  BOTTOM w0.36: Q3.1 53.84,1.98 v1(53.84,2.56) ; v2(63.83,5.32) 62.51,4 R37.2 v1(61,3.03) R41.1
N527202: length 2.4
  BOTTOM w0.36: Q3.3 56.54,2.47 56.91,2.1 R40.2
N527222: length 7.2
  BOTTOM w0.36: R30.1 R31.2 59.8,7.67 59.26,8.21 57.09,8.21 56.57,7.69 Q2.1
N527434: length 5.1
  BOTTOM w0.36: R32.1 57.71,5.4 57.42,5.11 Q2.2 55.43,5.11 54.21,3.89 Q3.2
N541574: length 1.5
  TOP w0.46: R8.2 D3.2
N546758: length 11.2
  TOP w0.25: U5.4 52.9,10.1 53.49,10.69 56.81,10.69 57.2,10.3 R5.2 C10.2
  TOP w0.36: U5.4 52,9.5 50.9,8.4 50.9,8.4 50.5,8 PD1.1
N546765: length 6.9
  TOP w0.25: U5.1 56.8,7.6 57.2,8 R5.1 C10.1 59.3,8.5 59.7,8.9 59.7,9.4 59.95,9.65 U3.2
N549679: length 2.6
  TOP w0.36: U4.2 64.45,9.65 63.5,8.7 U3.4
N554827: length 1.3
  TOP w0.38: D2.2 R4.1
N555295: length 1.3
  TOP w0.46: R1.1 D1.2
N563900: length 1.9
  TOP w0.28: R8.1 65.8,3.6 66.45,2.95 U7.18
N602776: length 10.1
  TOP w0.2: R44.1 80.48,22.8 80.12,23.16 75.14,23.16 74.78,22.8 R45.1 74,21.86 73.85,21.71 U1.44

## Copper pours and planes (outline as drawn; the poured copper is in the pictures)
GND on TOP (solid shape): 67.77,12.58 66.4,12.58 66.4,14.76 67.77,14.76
GND on TOP (solid shape): 86.89,13.65 82.5,13.65 82.5,14.45 86.89,14.45
GND on TOP (solid shape): 88.55,18.2 85.3,18.2 85.3,23.57 88.55,23.57
GND on TOP (solid shape): 88.55,1.53 83.39,1.53 83.39,4.47 88.55,4.47
GND on TOP (solid shape): 55.74,15.43 53.75,15.43 53.75,15.68 54.41,16.34 55.74,16.34
GND on TOP (solid shape): 49.35,14.76 49.4,14.71 49.4,13.8 47.45,13.8 47.45,16.36 49.35,16.36
GND on TOP (solid shape): 53.4,14.68 54.66,14.68 54.66,13.29 53.75,13.29 53.75,14.5 52.8,14.5 52.8,15.1 53.4,15.1
GND on TOP (solid shape): 64,23.22 64,20.9 63.15,20.9 63.15,22.19 60.65,22.19 60.65,21.05 58.6,21.05 58.6,23.22 60.3,23.22 63.42,23.22
GND on BOTTOM (solid shape): 6.6,8.1 4.39,8.1 4.39,10.45 6.6,10.45
GND on BOTTOM (solid shape): 30.07,3.93 28.73,3.93 28.73,4.88 30.07,4.88
GND on BOTTOM (solid shape): 84.75,18.15 81.88,18.15 81.88,18.95 84.75,18.95
GND on BOTTOM (solid shape): 88.3,1.53 85.3,1.53 85.3,6.9 88.3,6.9
GND on BOTTOM (solid shape): 88.55,20.63 85.3,20.63 85.3,23.57 88.55,23.57
GND on BOTTOM (solid shape): 19.27,15.5 16.6,15.5 16.6,17.05 19.27,17.05
GND on BOTTOM (solid shape): 39.27,15.35 36.6,15.35 36.6,17.05 39.27,17.05
GND on BOTTOM (solid shape): 19.2,5.06 20.16,4.1 20.75,4.1 20.75,1.6 19.25,1.6 19.25,3.4 18.6,4.05 18.6,6.5 19.2,6.5
GND on BOTTOM (solid shape): 68.5,19.9 66.5,19.9 66.5,21.91 59.5,21.91 59.5,19.9 57.5,19.9 57.5,23.95 68.5,23.95
GND on BOTTOM (solid shape): 12.74,4.39 12.25,3.9 12.25,1.6 10.25,1.6 10.25,3.4 11.01,3.4 11.74,4.13 11.74,5.12 10.4,5.12 10.4,5.82 11.74,5.82 11.74,6.57 12.74,6.57
GND on BOTTOM (solid shape): 30.2,21.9 29,21.9 29,23.3 26.7,23.3 26.56,23.24 26.5,23.1 26.5,22 27.3,21.2 27.3,20 25.9,20 25.9,23.95 30.2,23.95
GND on BOTTOM (solid shape): 10.6,21.9 9.4,21.9 9.4,23.3 7.1,23.3 6.96,23.24 6.9,23.1 6.9,22 6.94,21.82 7.04,21.66 7.5,21.2 7.5,20 6.1,20 6.1,23.95 10.6,23.95
GND on GND: 1,24 89,24 89,1 1,1 ; 3 cut-outs
P1V8 on TOP (solid shape): 72,19.4 71.3,18.7 69.8,18.7 69.8,20.9 72,20.9
P1V8 on TOP (solid shape): 57.6,19.25 60.22,19.25 61.44,20.47 61.44,20.75 62.6,20.75 62.6,19.85 61.44,19.85 60.4,18.81 60.4,17.75 58.6,17.75 58.05,17.2 54.6,17.2 53.48,16.07 53.48,15.45 53.23,15.45 53.23,16.34 54.6,17.72 54.6,23.2 57.6,23.2
P1V8 on VCC: 80.68,23.95 80.68,3.61 80.29,3.21 72.78,3.21 71.7,2.13 69.77,2.13 68.74,3.16 68.74,7.07 69.15,7.48 69.15,11.93 68.5,12.58 60.97,12.58 60.17,13.37 60.17,15.71 58.98,16.89 54.6,16.89 54.59,16.9 54.59,23.95
P3V3 on TOP (solid shape): 86.89,12.4 82.5,12.4 82.5,13.2 86.89,13.2
P3V3 on BOTTOM (solid shape): 84.75,19.4 81.88,19.4 81.88,20.2 84.75,20.2
P3V3 on BOTTOM (solid shape): 46.86,9.97 45.54,9.97 45.54,12.05 46.86,12.05
P3V3 on BOTTOM (solid shape): 15.7,3.4 17.45,3.4 17.45,1.6 13.5,1.6 13.5,4.3 13.2,4.6 13.2,4.93 14.18,4.93
P3V3 on VCC (solid shape): 46.86,2.6 46.57,1.89 45.86,1.6 13.55,1.6 13.55,4.44 16.73,4.44 17.22,4.93 17.22,8.18 16.58,8.83 14.49,8.83 14.34,8.98 14.34,9.56 14.54,9.76 17.29,9.76 18.16,8.89 18.16,3.61 19.04,2.73 44.54,2.73 45.25,3.03 45.54,3.73 45.54,11.15 46.86,11.15
P3V3 on VCC: 88.95,23.95 88.95,1.05 46.94,1.05 46.86,1.13 46.86,9.97 45.54,9.97 45.54,12.05 67.77,12.05 68.22,11.59 68.22,10.84 68.22,7.46 68.22,2.71 69.12,1.82 69.22,1.71 71.78,1.71 72.64,2.57 80.97,2.57 81.4,2.99 81.4,23.95 ; 1 cut-out
LDO22 on BOTTOM (solid shape): 23.9,17.05 21.63,17.05 21.63,18.77 23.9,18.77
LDO22 on VCC: 19.37,9.05 19.37,7.44 21.37,5.44 21.37,4.52 21.84,4.05 42.16,4.05 43.69,5.59 43.69,10.22 43.48,10.43 38.17,10.43 37.06,11.54 37.06,14.5 36.09,15.47 29.72,15.47 26.15,19.04 21.8,19.04 21.59,18.83 21.59,15.6 22.65,14.55 28.12,14.55 28.73,13.94 28.73,11.1 28.18,10.55 20.87,10.55
LDO22-1 on BOTTOM (solid shape): 21.03,16.69 20.28,16.69 20.28,18.77 21.03,18.77
LDO22-1 on BOTTOM (solid shape): 9.9,18.98 8.96,18.98 8.77,18.94 8.62,18.83 7.58,17.8 6.1,17.8 6.1,19 7.5,19 7.58,19.08 7.74,19.19 7.92,19.23 9.9,19.23
LDO22-1 on VCC (solid shape): 9.52,18.54 13.42,18.54 14.03,17.92 20.84,17.92 21.03,17.73 21.03,16.69 20.28,16.69 19.65,17.32 12.07,17.32 11.24,18.15 7.94,18.15 7.67,17.89 7.3,17.89 6.87,18.32 6.87,18.44 7.9,19.48 8.57,19.48
LDO22-2 on BOTTOM (solid shape): 29.7,18.98 28.75,18.98 28.57,18.94 28.41,18.83 27.38,17.8 24.5,17.8 24.5,18.6 24.76,18.86 24.92,18.96 25.1,19 27.3,19 27.38,19.08 27.54,19.19 27.73,19.23 29.7,19.23
VCAP on BOTTOM (solid shape): 11.2,8.9 10.12,8.9 9.55,8.33 9.55,7.12 10.1,6.57 11.2,6.57 11.2,6.02 6.3,6.02 6.3,7.12 6.87,7.12 7.6,7.86 7.6,9.5 11.2,9.5
VCAP on VCC (solid shape): 19.51,13.8 27.77,13.8 27.77,13.17 26.81,13.17 26.65,13.01 22.61,13.01 22.45,13.17 18.64,13.17 17.31,14.5 8.98,14.5 8.15,13.66 8.15,11.27 9.75,9.67 11.18,9.67 11.28,9.57 11.28,7.78 15.4,7.78 16.73,6.45 16.73,5.3 16.73,5.3 15.89,5.3 15.89,5.3 15.89,6.21 14.76,7.35 9.51,7.35 9.51,6.03 6.98,6.03 6.98,13.98 8.56,15.56 17.75,15.56
VCAP1 on BOTTOM (solid shape): 13.56,19.23 13.75,19.19 13.91,19.08 14.11,18.88 14.21,18.72 14.25,18.54 14.25,17 14.28,16.93 14.35,16.9 15.6,16.9 15.6,15.5 14.4,15.5 13.47,16.43 13.39,16.48 13.3,16.5 12,16.5 12,17.1 12.99,17.1 13.08,17.12 13.16,17.17 13.56,17.57 13.61,17.65 13.63,17.74 13.63,18.66 13.61,18.75 13.56,18.83 13.48,18.9 13.4,18.96 13.31,18.98 12,18.98 12,19.23
VCAP2 on BOTTOM (solid shape): 33.08,19.23 33.27,19.19 33.42,19.08 34.01,18.5 34.11,18.34 34.15,18.16 34.15,17.1 34.21,16.96 34.35,16.9 35.6,16.9 35.6,15.5 34.39,15.5 34.21,15.54 34.05,15.64 33.33,16.36 33.18,16.46 32.99,16.5 31.8,16.5 31.8,17.1 32.84,17.1 33.02,17.14 33.18,17.24 33.41,17.47 33.51,17.63 33.55,17.81 33.55,18.24 33.51,18.42 33.41,18.58 33.15,18.83 33,18.94 32.81,18.98 31.8,18.98 31.8,19.22
N478267 on BOTTOM (solid shape): 17.3,22.27 14.55,22.27 14.37,22.24 14.21,22.13 12.8,20.73 12.8,20.48 12,20.48 12,21.3 11.96,21.48 11.86,21.64 11.6,21.9 11.6,23.32 17.3,23.32
N478271 on BOTTOM (solid shape): 14.25,20.23 14.53,20.17 14.76,20.01 15.85,18.93 17.3,18.93 17.3,17.88 15.1,17.88 15.1,18.91 14.17,19.84 14.01,19.94 13.83,19.98 12,19.98 12,20.23
N478287 on BOTTOM (solid shape): 11.2,4.39 10.16,4.39 8.5,2.73 8.5,1.68 6.3,1.68 6.3,2.73 7.87,2.73 10.07,4.93 11.2,4.93
N478385 on BOTTOM (solid shape): 12.8,18.48 12.55,18.48 11.1,17.03 11.1,16.2 10.5,16.2 10.5,17.16 10.69,17.16 12,18.48 12,18.73 12.8,18.73
N485107 on BOTTOM (solid shape): 36.9,22.27 34.35,22.27 34.17,22.24 34.01,22.13 32.6,20.73 32.6,20.48 31.8,20.48 31.8,21.7 31.74,21.84 31.6,21.9 31.2,21.9 31.2,23.32 36.9,23.32
N485115 on BOTTOM (solid shape): 33.8,20.22 33.99,20.18 34.14,20.08 35.16,19.07 35.31,18.96 35.5,18.93 36.9,18.93 36.9,17.87 34.7,17.87 34.7,18.63 34.66,18.81 34.56,18.97 33.69,19.83 33.54,19.94 33.35,19.98 31.8,19.98 31.8,20.22
N485483 on BOTTOM (solid shape): 32.6,18.48 32.38,18.48 30.9,17 30.9,16.2 30.3,16.2 30.3,17.16 30.48,17.16 31.8,18.48 31.8,18.73 32.6,18.73
N491611 on TOP (solid shape): 51.7,15.68 52.45,15.68 52.45,14.93 50.85,14.93 50.6,14.67 50.6,12.71 47.5,12.71 47.5,13.2 49.66,13.2 50,13.54 50,14.71 50.05,14.76 50.05,16.3 51.08,16.3
N491611 on BOTTOM (solid shape): 50.6,12.71 45.64,12.71 45.64,13.72 50.6,13.72
N492211 on TOP (solid shape): 51.3,18.02 52.98,16.34 52.98,15.45 52.73,15.45 52.73,16.15 51.67,17.2 48.3,17.2 48.3,23.2 51.3,23.2

Small or netless copper shapes (teardrops, artwork), in the pictures only: 3 on TOP

## Text on the board
Ref Des/Silkscreen Bottom: LDO22 | EXCLUSIVE | PHOTOVOLTAIC | ENERGY HARVESTER | GLPP2024-PSU-A1 | NO BUGS PERMANENTLY | NO POLARITY PROTECTION | WARNING
Ref Des/Silkscreen Top: ENERGY HARVESTER | PHOTOVOLTAIC | GLPP2024-PSU-A1
XSECTION_CHART: *  SURFACE | L1 TOP CONDUCTOR | *  DIELECTRIC | L2 GND CONDUCTOR | L3 VCC CONDUCTOR | L4 BOTTOM CONDUCTOR | DESIGN CROSS SECTION CHART | ___________________________ | TOTAL THICKNESS 1.0212 MM | 1-4
DIMENSION: 4 LAYERS PCB STACK, 1.0mm THINKNESS, NO IMPEDANCE MATCH DEMAND. | ANY QUESTIONS PLEASE CONTACT ME: +8613522296239 | FIGURE | FINISHED_SIZE | 0.15 | 0.2 | 0.9 | 1.0 | 1.2 | 1.8 | 3.0 | DRILL CHART: TOP to BOTTOM | ALL UNITS ARE IN MILLIMETERS | PLATED | NON-PLATED | QTY | 43 | 197 | 2 | 4 | 3
